# EAGLE board swt-001 (EAGLE 9.6.2)
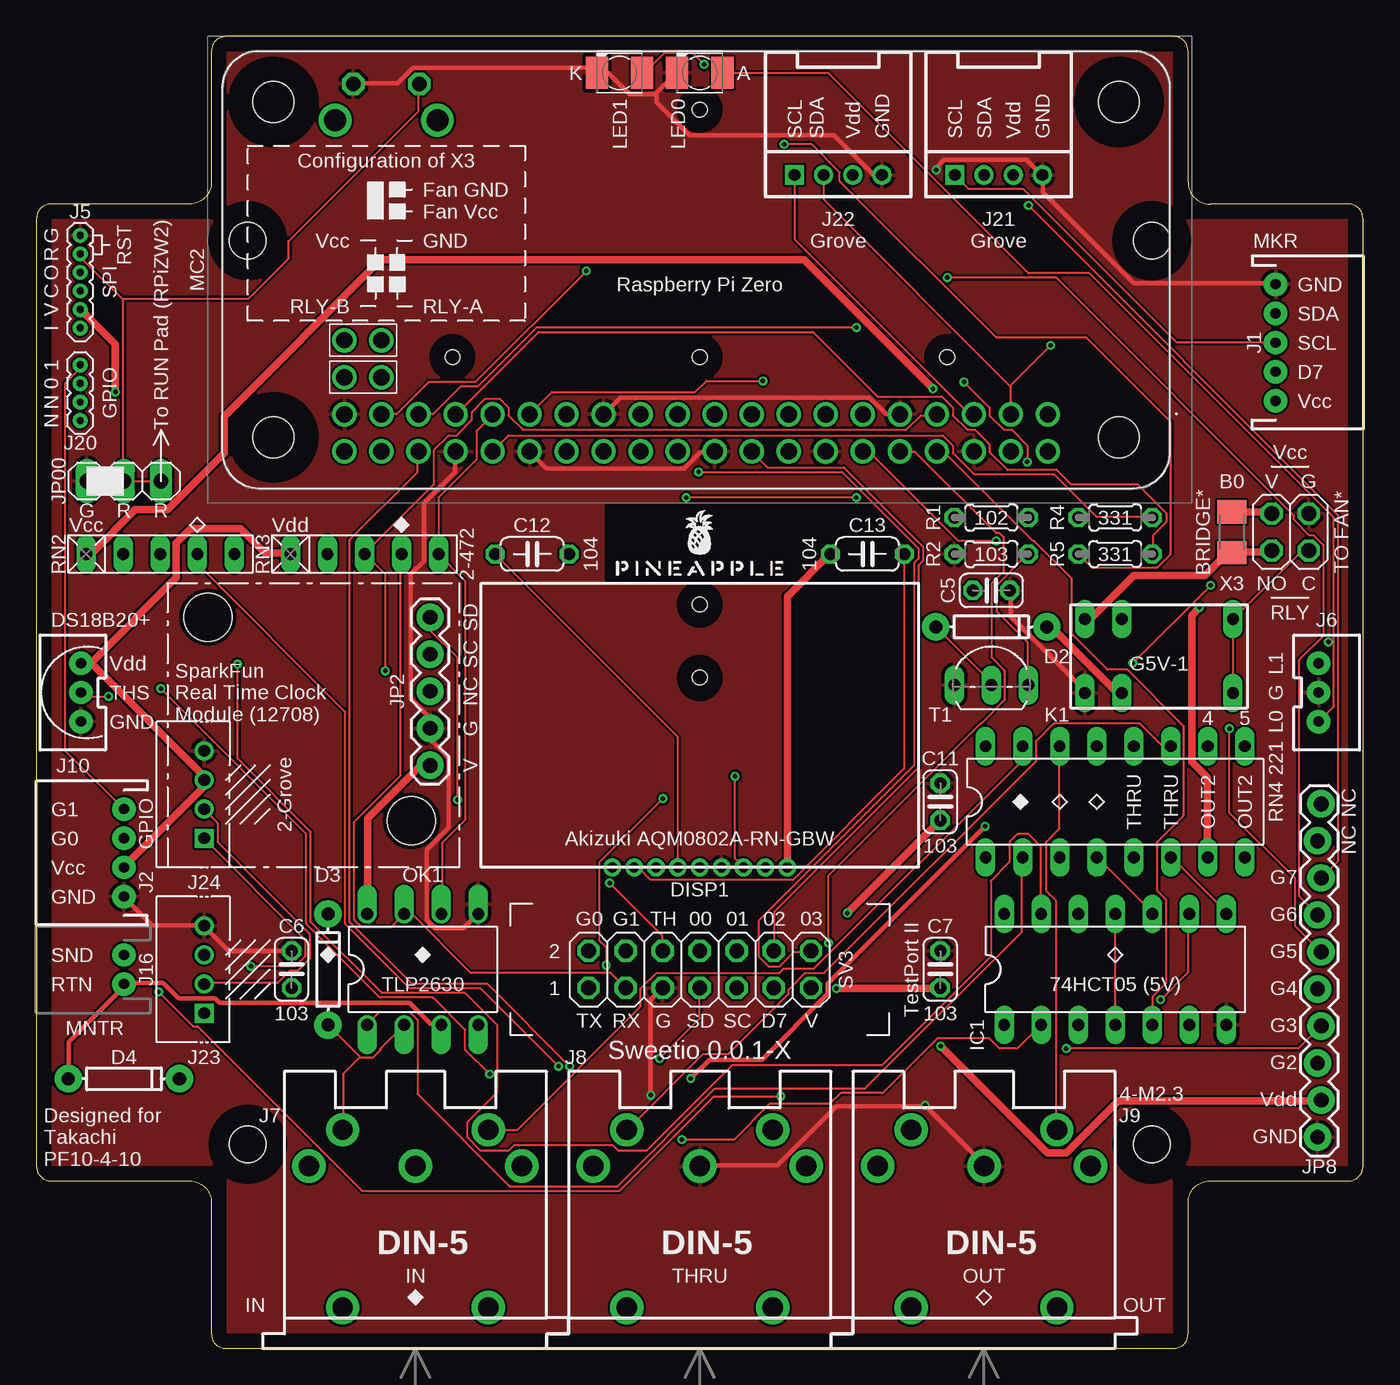
[diagram p0: board, top side]
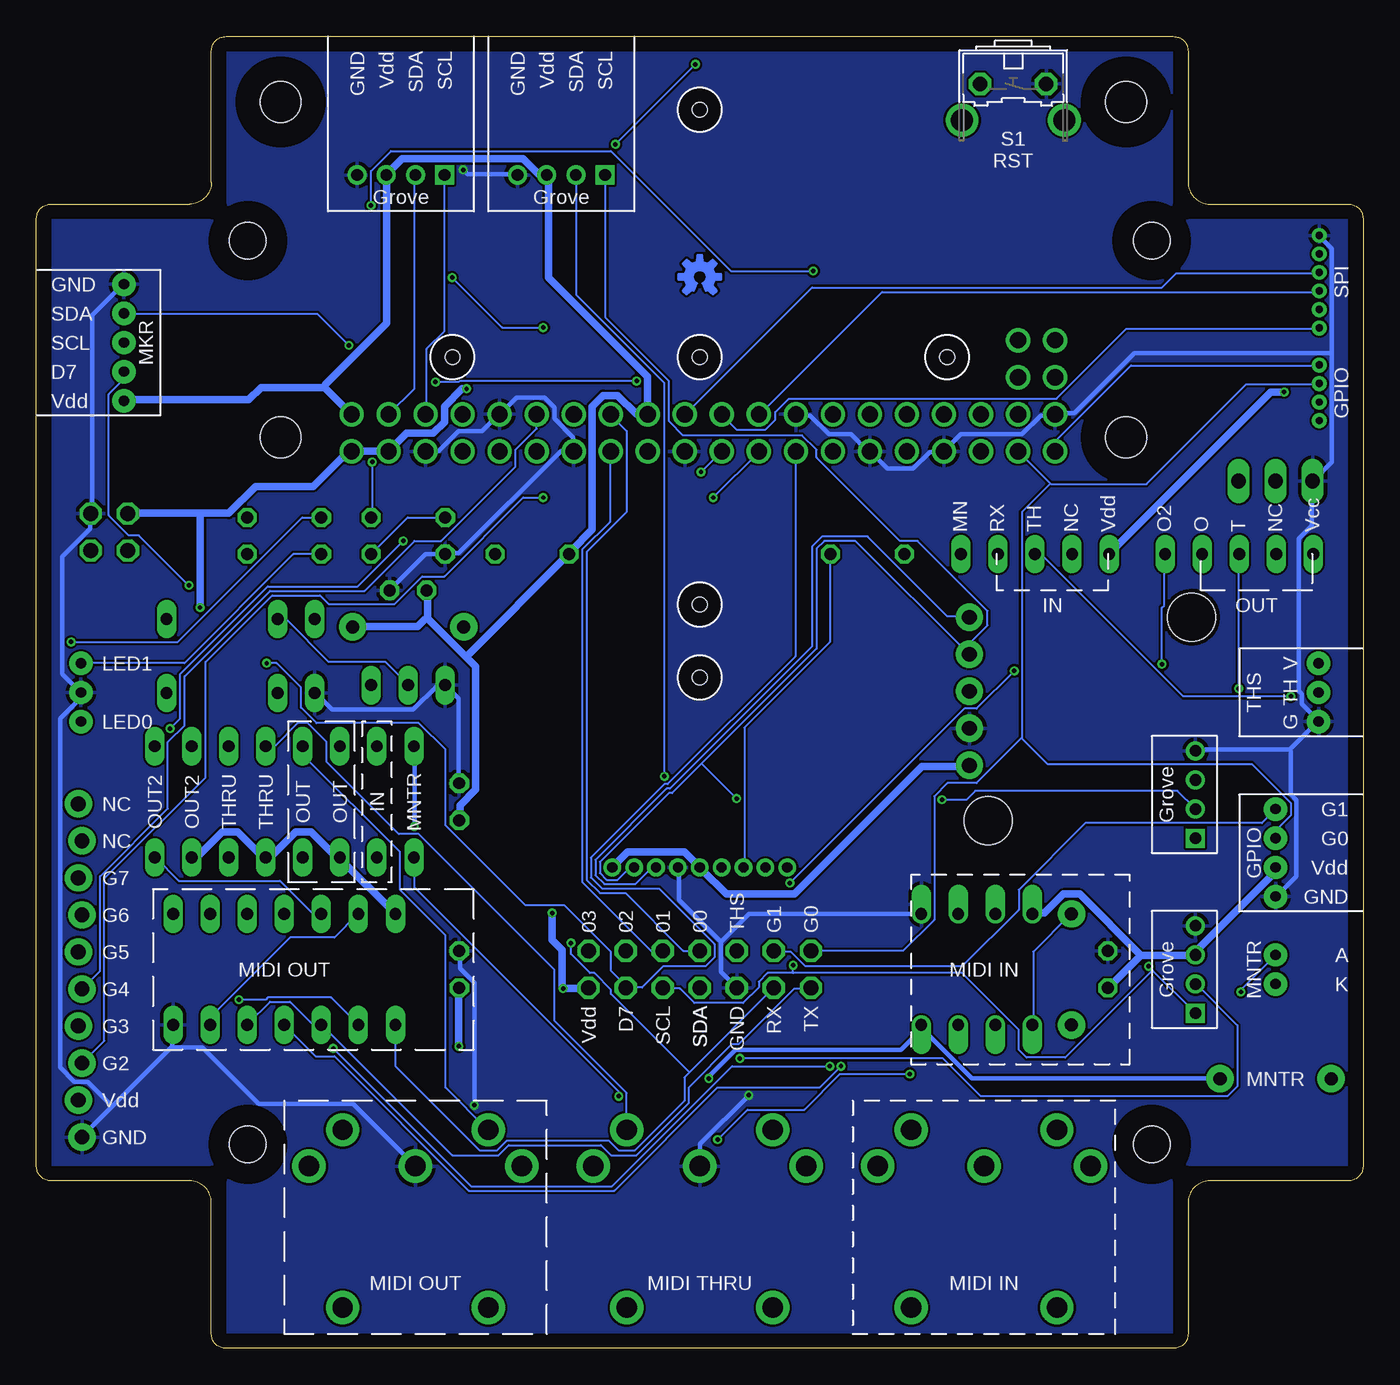
[diagram p1: board, bottom side, seen from below]

Size 91 x 90 mm. Coordinates in mm from the lower left corner, seen from the top.
Outline: 78,90 13,90 arc90 12,89 12,80 arc-90 10.5,78.5 1,78.5 arc90 0,77.5 0,12.5 arc90 1,11.5 10.5,11.5 arc-90 12,10 12,1 arc90 13,0 78,0 arc90 79,1 79,10 arc-90 80.5,11.5 90,11.5 arc90 91,12.5 91,77.5 arc90 90,78.5 80.5,78.5 arc-90 79,80 79,89 arc90 78,90
Copper layers (1*16): Top 0.035mm / dielectric 1.5mm / Bottom 0.035mm
Design rules "SeeedStudio_2layer_DRU_no_angle_20140221": minimum track width 6mil, minimum drill 12mil, track to track 6mil, track to pad 6mil, pad to pad 6mil, via to via 6mil, smd to smd 0mil, copper to edge 10mil, drill to drill 10mil, minimum pad ring 10mil, minimum via ring 6mil, stop-mask expansion 2mil, vias tented up to drill 100mil, thermal gap 10mil
Net classes: 0 default: width 0.152 mm, drill 0.152 mm, clearance 0.152 mm; 1 gnd: width 0.305 mm, drill 0.152 mm, clearance 0.152 mm; 2 power: width 0.508 mm, drill 0.152 mm, clearance 0.152 mm; 3 analog: width 0.305 mm, drill 0.152 mm, clearance 0.152 mm; 4 superpower: width 1.016 mm, drill 0.152 mm, clearance 0.152 mm
Holes 2.5 mm at 76.5,76 14.5,76 14.5,14 76.5,14
Holes 1 mm at 45.5,68 45.5,84.97 45.5,51.03 28.53,68 62.47,68 45.5,46.03
tRestrict: area 11.9,73.4 to 17.1,78.6; area 73.9,73.4 to 79.1,78.6; area 11.9,11.4 to 17.1,16.6; area 73.9,11.4 to 79.1,16.6; area 12,89 to 79,90; area 90,11.5 to 91,78.5; area 12,0 to 79,1; area 0,11.5 to 1,78.5; area 0,77.5 to 12,78.5; area 12,78.5 to 13,90; area 78,78.5 to 79,90; area 79,77.5 to 91,78.5; 19 more areas
bRestrict: area 11.9,11.4 to 17.1,16.6; area 73.9,11.4 to 79.1,16.6; area 73.9,73.4 to 79.1,78.6; area 11.9,73.4 to 17.1,78.6; area 78,0 to 79,11.5; area 79,11.5 to 91,12.5; area 90,11.5 to 91,78.5; area 79,77.5 to 91,78.5; area 78,78.5 to 79,90; area 12,89 to 79,90; area 12,78.5 to 13,90; area 0,77.5 to 12,78.5; 18 more areas

## Footprints (pad centres in the part's own frame; a part is rotated, then mirrored left to right if it is on the bottom)
M3216 = smd 1.6 x 2: 1 -1.4,0; 2 1.4,0
C025-024X044 = drill 0.813 octagon: 1 -1.27,0; 2 1.27,0
C050-024X044 = drill 0.813 octagon: 1 -2.54,0; 2 2.54,0
DIODE-1N4148 = drill 0.9 pad 1.88: A -3.81,0; C 3.81,0
AQM0802A-RN-GBW-FOOTPRINT = drill 0.7 pad 1: 1 -6,0; 2 -4.5,0; 3 -3,0; 4 -1.5,0; 5 0,0; 6 1.5,0; 7 3,0; 8 4.5,0; 9 6,0
STAND-OFF = hole 3.302: 0,0
DIL14 = drill 0.813 long: 1 -7.62,-3.81; 2 -5.08,-3.81; 3 -2.54,-3.81; 4 0,-3.81; 5 2.54,-3.81; 6 5.08,-3.81; 7 7.62,-3.81; 8 7.62,3.81; 9 5.08,3.81; 10 2.54,3.81; 11 0,3.81; 12 -2.54,3.81; 13 -5.08,3.81; 14 -7.62,3.81
JST-5-PTH = drill 0.7 pad 1.6: 1 -4,0; 2 -2,0; 3 0,0; 4 2,0; 5 4,0
JST-4-PTH = drill 0.7 pad 1.6: 1 -3,0; 2 -1,0; 3 1,0; 4 3,0
1X06_1.27MM = drill 0.508 pad 1: 1 0,0; 2 1.27,0; 3 2.54,0; 4 3.81,0; 5 5.08,0; 6 6.35,0
JST-3-PTH-VERT = drill 0.7 pad 1.6: 1 -2,-0.55; 2 0,-0.55; 3 2,-0.55
DIN5-RA-PTH = drill 1.4 pad 2.286: 1 7.3,12.5; 2 0,12.5; 3 -7.3,12.5; 4 5,15; 5 -5,15; 6 -5,2.8; 7 5,2.8
JST-2-PTH-NS = drill 0.7 pad 1.6: 1 -1,0; 2 1,0
1X04_1.27MM = drill 0.508 pad 1: 1 0,0; 2 1.27,0; 3 2.54,0; 4 3.81,0
4P-2.0-90D = drill 0.8 pad 1.27 square: 1 -3,0 | drill 0.8 pad 1.27: 2 -1,0; 3 1,0; 4 3,0
4P-2.0-W/O-BUCKLE = drill 0.8 pad 1.27 square: 1 -3,0 | drill 0.8 pad 1.27: 2 -1,0; 3 1,0; 4 3,0
1X03 = drill 1.016 long: 1 -2.54,0; 2 0,0; 3 2.54,0
1X05 = drill 1.016 pad 1.88: 1 0,0; 2 2.54,0; 3 5.08,0; 4 7.62,0; 5 10.16,0
1X10_LOCK = drill 1.016 pad 1.88: 1 0,0.127; 2 2.54,-0.127; 3 5.08,0.127; 4 7.62,-0.127; 5 10.16,0.127; 6 12.7,-0.127; 7 15.24,0.127; 8 17.78,-0.127; 9 20.32,0.127; 10 22.86,-0.127
G5V1 = drill 0.813 long: 1 -5.08,-2.54; 2 -2.54,-2.54; 5 5.08,-2.54; 6 5.08,2.54; 9 -2.54,2.54; 10 -5.08,2.54
KA-3528ASYC = smd 1.5 x 2.2: A -1.55,0; C 1.55,0
RASPBERRYPIZEROWV13 = drill 1.11: 1 -23.885,9.92; 2 -23.885,12.46; 3 -21.345,9.92; 4 -21.345,12.46; 5 -18.805,9.92; 6 -18.805,12.46; 7 -16.265,9.92; 8 -16.265,12.46; 9 -13.725,9.92; 10 -13.725,12.46; 11 -11.185,9.92; 12 -11.185,12.46; 13 -8.645,9.92; 14 -8.645,12.46; 15 -6.105,9.92; 16 -6.105,12.46; 17 -3.565,9.92; 18 -3.565,12.46; 19 -1.025,9.92; 20 -1.025,12.46; 21 1.515,9.92; 22 1.515,12.46; 23 4.055,9.92; 24 4.055,12.46; 25 6.595,9.92; 26 6.595,12.46; 27 9.135,9.92; 28 9.135,12.46; 29 11.675,9.92; 30 11.675,12.46; 31 14.215,9.92; 32 14.215,12.46; 33 16.755,9.92; 34 16.755,12.46; 35 19.295,9.92; 36 19.295,12.46; 37 21.835,9.92; 38 21.835,12.46; 39 24.375,9.92; 40 24.375,12.46; 41 24.375,7.38; 42 21.835,7.38; 43 21.835,4.84; 44 24.375,4.84 | hole 2.8: -28.755,11.5; -28.755,-11.5; 29.245,-11.5; 29.245,11.5
DIL08 = drill 0.813 offset: 1 -3.81,-3.81; 2 -1.27,-3.81; 3 1.27,-3.81; 4 3.81,-3.81; 5 3.81,3.81; 6 1.27,3.81; 7 -1.27,3.81; 8 -3.81,3.81
0204/5 = drill 0.813 octagon: 1 -2.54,0; 2 2.54,0
RN-5 = drill 0.813 long: 1 -5.08,0; 2 -2.54,0; 3 0,0; 4 2.54,0; 5 5.08,0
DIL16 = drill 0.813 long: 1 -8.89,-3.81; 2 -6.35,-3.81; 3 -3.81,-3.81; 4 -1.27,-3.81; 5 1.27,-3.81; 6 3.81,-3.81; 7 6.35,-3.81; 8 8.89,-3.81; 9 8.89,3.81; 10 6.35,3.81; 11 3.81,3.81; 12 1.27,3.81; 13 -1.27,3.81; 14 -3.81,3.81; 15 -6.35,3.81; 16 -8.89,3.81
B3F-31XX = drill 1.016 octagon: 1 -2.261,-1.245; 2 2.261,-1.245 | drill 1.499 pad 2.159: 3 -3.505,1.245; 4 3.505,1.245
2X07 = drill 1.016 octagon: 1 -7.62,-1.27; 2 -7.62,1.27; 3 -5.08,-1.27; 4 -5.08,1.27; 5 -2.54,-1.27; 6 -2.54,1.27; 7 0,-1.27; 8 0,1.27; 9 2.54,-1.27; 10 2.54,1.27; 11 5.08,-1.27; 12 5.08,1.27; 13 7.62,-1.27; 14 7.62,1.27
TO92-ECB = drill 0.813 long: B 2.54,0; C 0,0; E -2.54,0
2X02 = drill 1.016 octagon: 1 -1.27,-1.27; 2 -1.27,1.27; 3 1.27,-1.27; 4 1.27,1.27

## Placement (x,y rotation side)
B0  0  [M3216]  82,56 270 top
C5  10n  [C025-024X044]  65.5,52 0 top
C6  10n  [C025-024X044]  17.5,26 90 top
C7  100n  [C025-024X044]  62,26 90 top
C11  100n  [C025-024X044]  62,37.5 90 top
C12  1u  [C050-024X044]  34,54.5 0 top
C13  1u  [C050-024X044]  57,54.5 0 top
D2  [DIODE-1N4148]  65.5,49.5 0 top
D3  [DIODE-1N4148]  20,26 90 top
D4  [DIODE-1N4148]  6,18.5 0 top
DISP1  AQM0802A-RN-GBW  [AQM0802A-RN-GBW-FOOTPRINT]  45.5,33 0 top
H1  STAND-OFF  [STAND-OFF]  25.73,36.19 0 top
H2  STAND-OFF  [STAND-OFF]  11.76,50.16 0 top
IC1  74ACT06N  [DIL14]  74,26 0 top
J1  MKR  [JST-5-PTH]  85,69 270 top
J2  GPIO  [JST-4-PTH]  6,34 90 top
J5  SPI  [1X06_1.27MM]  3,70 90 top
J6  LED  [JST-3-PTH-VERT]  88.5,45 270 top
J7  DIN5  [DIN5-RA-PTH]  26,0 0 top
J8  DIN5  [DIN5-RA-PTH]  45.5,0 0 top
J9  DIN5  [DIN5-RA-PTH]  65,0 0 top
J10  THS  [JST-3-PTH-VERT]  2.5,45 90 top
J16  MNTR  [JST-2-PTH-NS]  6,26 90 top
J20  GPIO  [1X04_1.27MM]  3,63.65 90 top
J21  Grove  [4P-2.0-90D]  66,80.5 0 top
J22  Grove  [4P-2.0-90D]  55,80.5 0 top
J23  Grove  [4P-2.0-W/O-BUCKLE]  11.5,26 90 top
J24  Grove  [4P-2.0-W/O-BUCKLE]  11.5,38 90 top
JP00  RST  [1X03]  6,59.5 0 top
JP2  RTC  [1X05]  27,40 90 top
JP8  Extended GPIO  [1X10_LOCK]  88,14.5 90 top
K1  G5V1  [G5V1]  77,47.5 0 top
LED0  Green  [KA-3528ASYC]  45.5,87.5 180 top
LED1  Red  [KA-3528ASYC]  40,87.5 180 top
LOGO1  OSHW-LOGOS-COPPER  [OSHW-LOGO-S_COPPER]  45.5,73.5 0 bottom
MC2  RASPBERRY_PI_ZERO_W_(V1.3)  [RASPBERRYPIZEROWV13]  45.5,74 180 top
OK1  HCPL2630  [DIL08]  26.5,26 0 top
R1  1k  [0204/5]  65.5,57 0 top
R2  10k  [0204/5]  65.5,54.5 0 top
R4  1k  [0204/5]  74,57 0 top
R5  1k  [0204/5]  74,54.5 0 top
RN2  4.7k  [RN-5]  8.5,54.5 0 top
RN3  4.7k  [RN-5]  22.5,54.5 0 top
RN4  220  [DIL16]  74,37.5 0 top
S1  RST  [B3F-31XX]  24,85.5 180 bottom
SV3  Testport II  [2X07]  45.5,26 0 top
T1  2SC1815  [TO92-ECB]  65.5,45.5 0 top
U$1  PINEAPPLE450_SILK  [PINEAPPLE450_SILK]  45.5,53 0 top
X3  FAN  [2X02]  86,56 180 top

## Library data of the parts
B0 = rcl; SPICEPREFIX: R
C5-C7 R1 R2 R4 R5 = resistor
C11-C13 = rcl; SPICEPREFIX: C
D2-D4 = SparkFun-DiscreteSemi; PROD_ID: DIO-08378
DISP1 = AQM0802A-RN-GBW
H1 H2 = SparkFun-Hardware
IC1 = 74xx-eu
J1 = SparkFun-Connectors; SF_ID: PRT-09917
J2 = SparkFun-Connectors; PROD_ID: WIRE-13531; SF_ID: PRT-09916
J5 J16 J20 JP2 JP8 = SparkFun-Connectors
J6 J10 = SparkFun-Connectors; PROD_ID: CONN-13230
J7-J9 = SparkFun-Connectors; PROD_ID: CONN-09481
J21-J24 = Connector
JP00 SV3 X3 = pinhead
K1 = relay; MPN: G5V-1-DC24; OC_FARNELL: 9949593; OC_NEWARK: 36M6377
LED0 LED1 = led
LOGO1 = SparkFun-Aesthetics
MC2 = Raspberry_Pi_Zero_W_(v1.3); ARROW_PART_NUMBER: Raspberry Pi Zero W (v1.3); DESCRIPTION: Raspberry Pi Zero W (v1.3) Single-board Computers; HEIGHT: mm; MANUFACTURER_NAME: RASPBERRY-PI; MANUFACTURER_PART_NUMBER: Raspberry Pi Zero W (v1.3)
OK1 = optocoupler; MF: AGILENT TECHNOLOGIES; MPN: HCPL-2630-000E; OC_FARNELL: 9994904; OC_NEWARK: 88H7813
RN2 RN3 = resistor-net; OC_FARNELL: unknown; OC_NEWARK: unknown
RN4 = resistor-dil; OC_FARNELL: unknown; OC_NEWARK: unknown
S1 = switch-omron; MPN: B3F-3100; OC_FARNELL: 959704; OC_NEWARK: 36M3582
T1 = transistor
U$1 = pineapple

## Nets
BASE: R1.1 R2.2 T1.B
CAP1N: C12.2 DISP1.3
CAP1P: C12.1 DISP1.4
COLLECTOR: D2.A K1.9 T1.C
COMMON: K1.5 K1.6 X3.2
DIGITAL7: J1.4 MC2.26 SV3.11
DTCT0: MC2.15 SV3.8
DTCT1: MC2.16 SV3.10
DTCT2: MC2.18 SV3.12
DTCT3: MC2.22 SV3.14
FANDRIVE [power]: B0.2 K1.10 X3.4
GND [gnd]: C5.2 C6.2 C7.2 C11.2 DISP1.6 IC1.7 J1.1 J2.1 J5.6 J6.2 J8.2 J9.2 J10.1 J21.4 J22.4 J23.4 J24.4 JP00.1 JP2.2 JP8.1 K1.1 LED0.C LED1.C MC2.6 MC2.9 MC2.14 MC2.20 MC2.25 MC2.30 MC2.34 MC2.39 OK1.5 R2.1 S1.1 SV3.5 T1.E X3.1
GPIO0: J2.3 J20.3 MC2.38 SV3.2
GPIO1: J2.4 J20.4 MC2.40 SV3.4
GPIO2: JP8.3 MC2.24
GPIO3: JP8.4 MC2.36
GPIO4: JP8.5 MC2.11
GPIO5: JP8.6 MC2.12
GPIO6: JP8.7 MC2.35
GPIO7: JP8.8 MC2.37
LCDVOUT: C13.2 DISP1.2
LED0: MC2.32 R4.2
LED0A: J6.3 LED0.A R4.1
LED1: MC2.33 R5.2
LED1A: J6.1 LED1.A R5.1
MIDIINSND: D3.C OK1.1 RN4.2
MIRTN: D3.A J7.5 OK1.2
MISND: J7.4 RN4.15
MISO: J5.1 MC2.21
MNTR: MC2.31 OK1.6 RN3.5
MNTRA: J16.2 RN4.1
MNTRAA [gnd]: D4.C OK1.4 RN4.16
MNTRK [gnd]: D4.A J16.1 OK1.3
MO2RTN: RN4.9
MO2RTNRAW: IC1.12 RN4.8
MO2SND: RN4.10
MORTN: J9.5 RN4.13
MORTNRAW: IC1.10 RN4.4
MOSI: J5.4 MC2.19
MOSND: J9.4 RN4.14
MTRTN: J8.5 RN4.11
MTRTNRAW: IC1.8 RN4.6
MTSND: J8.4 RN4.12
NMO2RTN: IC1.6 IC1.13 RN2.5
NMORTN: IC1.4 IC1.11 RN2.4
NMTRTN: IC1.2 IC1.9 RN2.3
RLY: MC2.29 R1.2
RST: J5.5 JP00.2 JP00.3 S1.2
RX: IC1.1 MC2.10 OK1.7 RN3.4 SV3.3
SCK: J5.3 MC2.23
SCL: DISP1.8 J1.3 J21.1 J22.1 J23.1 J24.1 JP2.4 MC2.5 SV3.9
SDA: DISP1.7 J1.2 J21.2 J22.2 J23.2 J24.2 JP2.5 MC2.3 SV3.7
THS: J10.2 MC2.7 RN3.3 SV3.6
TX: IC1.3 IC1.5 MC2.8 SV3.1
VCC [power]: B0.1 IC1.14 MC2.2 MC2.4 RN2.1 RN4.3 RN4.5 RN4.7 X3.3
VDD [power]: C5.1 C6.1 C7.1 C11.1 C13.1 D2.C DISP1.5 DISP1.9 J1.5 J2.2 J5.2 J10.3 J21.3 J22.3 J23.3 J24.3 JP2.1 JP8.2 K1.2 MC2.1 MC2.17 OK1.8 RN3.1 SV3.13

## Tracks (layer width: path | path; a pad name or v marks a point on that pad's centre or on a via)
BASE
  Top 0.152: T1.B 67.97,45.57 67.97,48.46 65.84,50.6 65.84,52.35 67.97,54.48 R2.2
  Bottom 0.152: R1.1 63.02,57 65.53,57 67.97,54.56 R2.2
CAP1N
  Bottom 0.152: DISP1.3 42.44,33.07 42.44,42.6 36.58,48.46 36.58,54.48 C12.2
CAP1P
  Top 0.152: DISP1.4 43.97,33.07 43.97,41.99 31.47,54.48 C12.1
COLLECTOR
  Top 0.152: T1.C 65.46,45.57 65.46,45.72 61.72,49.45 D2.A
  Bottom 0.152: K1.9 74.45,49.99 73.84,49.99 70.94,47.09 67.06,47.09 65.53,45.57 T1.C
COMMON
  Top 0.152: K1.5 82.07,45.03 82.07,49.99 K1.6 82.14,50.06 86.79,54.71 87.25,54.71 X3.2
DIGITAL7  (via drill 0.3)
  Top 0.152: v75.21,47.02 v80.54,52.35
  Bottom 0.152: MC2.26 38.94,61.49 38.94,47.47 47.7,38.71 47.93,38.71 52.96,33.68 52.96,32.31 52.2,31.55 48.31,31.55 44.5,27.74 44.5,26.82 45.11,26.21 48.01,26.21 49.45,24.77 50.52,24.77 SV3.11 50.52,24.84 51.59,25.91 51.59,27.2 54.79,30.4 57.45,30.4 62.94,35.89 62.94,41.07 64.77,42.9 71.78,42.9 72.85,43.97 72.85,45.34 74.52,47.02 v75.21,47.02 | v80.54,52.35 83.97,55.78 84.66,55.78 86.03,57.15 86.03,65.46 85.04,66.45 85.04,66.98 J1.4
DTCT0
  Bottom 0.152: SV3.8 45.57,27.28 46.63,27.28 50.6,31.24 52.35,31.24 53.26,32.16 53.26,54.63 50.52,57.38 50.52,62.94 51.59,64.01 MC2.15
DTCT1
  Bottom 0.152: SV3.10 48.08,27.28 48.84,27.28 53.57,32 53.57,54.79 51.66,56.69 51.66,61.49 MC2.16
DTCT2
  Top 0.152: SV3.12 50.6,27.28 50.6,29.95 60.5,39.85 60.5,53.72 60.81,54.03 60.81,55.02 55.4,60.43 50.14,60.43 49.07,61.49 MC2.18
DTCT3  (via drill 0.3)
  Top 0.152: v45.41,60.12 55.24,60.12 60.5,54.86 60.5,54.18 60.2,53.87 60.2,40.01 49.53,29.34 49.53,26.9 50.22,26.21 50.98,26.21 51.97,27.2 53.11,27.2 SV3.14
  Bottom 0.152: v45.41,60.12 44.04,61.49 MC2.22
FANDRIVE
  Top 0.508: X3.4 84.66,54.71 84.58,54.63 82.07,54.63 B0.2 81.76,54.63 80.16,53.03 75.29,53.03 72.31,50.06 71.93,50.06 K1.10
GND  (via drill 0.3)
  Top 0.305: 42.44,86.03 40.69,86.03 39.24,87.48 38.48,87.48 LED1.C 38.33,87.55 38.02,87.86 25.83,87.86 24.77,86.79 21.79,86.79 S1.1 | 42.44,86.03 43.89,87.48 LED0.C | J22.4 57.99,80.54 57.38,80.54 54.71,83.21 44.81,83.21 42.52,85.5 42.52,85.95 42.44,86.03 | J1.1 84.96,73.08 75.29,73.08 69.04,79.32 69.04,80.47 J21.4 68.89,80.54 67.89,81.53 62.26,81.53 61.72,81 v61.72,80.85 | J9.2 65.08,12.57 v60.96,16.69 60.88,16.61 54.86,16.61 50.83,12.57 45.57,12.57 J8.2 | K1.1 71.86,45.03 71.86,45.19 66.83,50.22 66.83,51.97 C5.2 | OK1.5 30.25,29.79 29.26,28.8 27.36,28.8 26.75,29.41 26.75,34.21 28.27,35.74 28.27,40.54 27.05,41.76 27.05,42.52 JP2.2 26.98,42.67 26.98,43.28 25.68,44.58 25.68,53.11 26.59,54.03 26.59,57.99 28.73,60.12 28.73,61.49 MC2.34 | MC2.20 46.48,61.49 45.57,61.49 44.42,60.35 34.98,60.35 33.83,61.49 MC2.30 | J2.1 6.02,30.94 7.92,29.03 11.43,29.03 J23.4 11.58,28.88 13.18,27.28 17.45,27.28 C6.2 | MC2.9 59.21,64.08 58.29,64.08 57.15,65.23 40.08,65.23 38.94,64.08 MC2.25 | v42.14,17.37 42.14,23.93 42.9,24.69 SV3.5
  Bottom 0.305: J1.1 85.04,73 87.17,70.87 87.17,57.38 X3.1 87.33,57.23 87.33,56.24 89.23,54.33 89.23,46.25 88.01,45.03 J6.2 88.01,44.88 88.01,44.58 89.38,43.2 89.38,19.28 88.39,18.29 87.48,18.29 85.8,16.61 | v61.72,80.85 61.42,80.54 58.06,80.54 J22.4 | 81.69,20.73 81.69,22.17 IC1.7 | 85.8,16.61 87.86,14.55 JP8.1 | 85.8,16.61 81.69,20.73 | v60.96,16.69 60.96,25.07 61.95,26.06 61.95,27.2 C7.2 | 81.69,20.73 81.61,20.65 79.63,20.65 75.74,16.76 69.27,16.76 65.08,12.57 J9.2 | MC2.6 64.24,61.57 63.4,61.57 62.03,62.94 60.43,62.94 59.36,64.01 MC2.9 59.21,64.08 58.06,65.23 56.16,65.23 55.47,64.54 55.47,63.78 54.18,62.48 54.18,61.57 MC2.14 54.33,61.57 55.02,61.57 62.03,54.56 62.87,54.56 R2.1 63.02,54.48 64.31,54.48 66.75,52.05 C5.2 | C11.2 62.03,38.79 62.03,44.58 62.94,45.49 T1.E 63.09,45.49 63.48,45.49 65.15,43.81 70.71,43.81 71.86,44.96 K1.1 | 44.04,27.89 46.94,30.79 46.94,32.99 DISP1.6 | 44.04,27.89 44.04,25.83 42.98,24.77 SV3.5 | 44.04,27.89 42.14,29.79 30.33,29.79 OK1.5 | MC2.25 38.86,64.01 37.95,64.01 36.65,62.71 35.13,62.71 33.98,61.57 MC2.30 33.76,61.49 32.61,60.35 30.86,60.35 29.72,61.49 28.8,61.49 MC2.34 28.65,61.65 27.58,62.71 23.39,62.71 22.1,64.01 21.18,64.01 MC2.39 21.03,64.16 19.81,64.16 15.7,68.28 2.13,68.28 | 2.13,68.28 2.13,60.81 3.43,59.51 JP00.1 3.5,59.36 3.5,56.46 4.42,55.55 4.42,45.11 4.19,44.88 4.19,44.2 3.12,43.13 J10.1 3.12,42.98 5.03,41.07 | 2.13,68.28 2.13,75.44 2.97,76.28 J5.6 | 5.03,41.07 11.43,41.07 J24.4 | 5.03,41.07 4.95,41 4.95,38.02 4.57,37.64 4.57,32.38 5.94,31.01 J2.1 | v42.14,17.37 45.49,14.02 45.49,12.57 J8.2
  pour Top: -1,-1 92,-1 92,91 -1,91
  pour Bottom: -2,-2 93,-2 93,92 -2,92
GPIO0
  Bottom 0.152: 21.45,59.32 23.62,61.49 MC2.38 | 21.45,59.32 21.41,59.28 14.86,59.28 8,66.14 3.05,66.14 J20.3 | 23.43,41.87 23.39,41.91 23.39,57.38 21.45,59.32 | 23.43,41.87 26.52,38.79 28.5,38.79 29.41,37.87 29.41,29.41 31.55,27.28 SV3.2 | 23.43,41.87 21.64,40.08 7.62,40.08 4.95,37.41 4.95,36.58 5.94,35.59 5.94,35.05 J2.3
GPIO1
  Top 0.152: J20.4 2.97,67.44 2.97,67.21 1.98,66.22 1.98,41 5.94,37.03 J2.4
  Bottom 0.152: J20.4 3.05,67.44 15.93,67.44 21.11,62.26 21.11,61.57 MC2.40 | SV3.4 40.39,27.2 39.24,27.2 38.25,26.21 27.51,26.21 23.62,30.1 23.62,31.47 19.05,36.04 6.93,36.04 6.02,36.96 J2.4
GPIO2  (via drill 0.3)
  Top 0.152: v56.24,58.37 v44.58,58.37
  Bottom 0.152: v44.58,58.37 41.45,61.49 MC2.24 | v56.24,58.37 57.61,58.37 63.02,52.96 64.54,52.96 66.45,51.05 70.94,51.05 71.55,51.66 74.83,51.66 79.4,47.09 79.4,39.17 86.33,32.23 86.33,21.11 87.86,19.58 JP8.3
GPIO3  (via drill 0.3)
  Top 0.152: v36.58,19.36 30.94,24.99 25.76,24.99 21.49,29.26 21.49,55.47 26.14,60.12 26.14,61.49 MC2.36 | v70.64,20.57 86.56,20.57 88.09,22.1 JP8.4
  Bottom 0.152: v36.58,19.36 43.28,19.36 51.51,11.12 61.19,11.12 v70.64,20.57
GPIO4
  Bottom 0.152: MC2.11 56.69,64.01 56.69,63.09 58.14,61.65 58.14,60.5 63.25,55.4 65.08,55.4 68.5,51.97 74.98,51.97 80.85,46.1 80.85,42.75 81.99,41.6 81.99,37.03 86.64,32.38 86.64,25.91 87.86,24.69 JP8.5
GPIO5  (via drill 0.3)
  Top 0.152: v65.84,55.4 63.25,55.4 57.15,61.49 56.69,61.49 MC2.12 | v81.84,42.52 81.84,36.73 86.33,32.23 86.33,28.96 88.09,27.2 JP8.6
  Bottom 0.152: v65.84,55.4 68.96,52.27 75.13,52.27 81.15,46.25 81.15,43.2 v81.84,42.52
GPIO6  (via drill 0.3)
  Top 0.152: v56.24,70.03 34.29,70.03 30.25,65.99 29.11,65.99 27.2,64.08 26.21,64.08 MC2.35 | v62.48,73.46 69.95,73.46 86.26,57.15 86.26,56.84 87.33,55.78 87.63,55.78 88.32,55.09 88.32,48.92 86.64,47.24 86.64,31.01 87.86,29.79 JP8.7
  Bottom 0.152: v56.24,70.03 59.05,70.03 v62.48,73.46
GPIO7  (via drill 0.3)
  Top 0.152: v37.72,73.91 30.1,66.29 26.9,66.29 24.69,64.08 23.7,64.08 MC2.37 | v68.05,78.41 89.31,57.15 89.31,33.45 88.16,32.31 JP8.8
  Bottom 0.152: v37.72,73.91 43.36,73.91 51.59,82.14 66.67,82.14 68.05,80.77 v68.05,78.41
LCDVOUT
  Top 0.152: DISP1.2 41.07,32.99 41.3,32.99 42.14,32.16 51.89,32.16 59.51,39.78 59.51,54.48 C13.2
LED0
  Top 0.152: R4.2 76.5,57.07 72.69,57.07 69.8,59.97 64.31,59.97 62.87,61.42 62.87,61.95 62.18,62.64 32.38,62.64 31.32,61.57 MC2.32
LED0A  (via drill 0.3)
  Top 0.152: 89,48.46 89,44.04 88.01,43.05 J6.3 | 89,48.46 89,57 72.24,73.76 68.05,73.76 54.33,87.48 47.09,87.48 LED0.A | 89,48.46 v88.62,48.46
  Bottom 0.152: v88.62,48.46 81.31,48.46 72.77,57 71.48,57 R4.1
LED1
  Top 0.152: R5.2 76.58,54.56 76.58,55.78 77.5,56.69 77.5,57.3 75.51,59.28 70.94,59.28 69.95,60.27 66.6,60.27 65.38,61.49 65.38,62.03 64.39,63.02 63.86,63.02 62.87,64.01 62.87,64.54 62.1,65.3 57.68,65.3 53.26,69.72 34.44,69.72 28.8,64.08 MC2.33
LED1A  (via drill 0.3)
  Top 0.152: v45.8,88.09 45.03,88.85 43.05,88.85 41.76,87.55 41.6,87.55 LED1.A | v51.28,82.6 53.19,82.6 55.09,80.7 55.09,80.09 65.84,69.34 72.01,69.34 77.8,63.55 77.8,54.48 76.89,53.57 72.39,53.57 71.48,54.48 R5.1
  Bottom 0.152: v51.28,82.6 v45.8,88.09 | J6.1 87.94,47.02 80.85,47.02 73.38,54.48 71.48,54.48 R5.1
MIDIINSND
  Top 0.152: RN4.2 67.59,33.68 67.59,28.57 56.84,17.83 46.56,17.83 39.85,11.12 32.46,11.12 26.14,17.45 26.14,22.55 25.6,23.09 23.55,23.09 22.71,22.25 OK1.1
  Bottom 0.152: OK1.1 22.63,22.25 22.63,27.2 20.04,29.79 D3.C
MIRTN
  Top 0.152: 22.21,20 20.04,22.17 D3.A | 22.21,20 22.25,19.96 23.09,19.96 23.62,20.5 23.62,20.57 25.22,22.17 OK1.2 | 22.21,20 21.03,18.82 21.03,15.01 J7.5
MISND
  Top 0.152: RN4.15 67.59,41.3 67.59,40.31 53.34,26.06 51.28,26.06 50.98,25.76 42.52,25.76 41.45,24.69 41.45,23.47 32.99,15.01 31.01,15.01 J7.4
MISO
  Bottom 0.152: J5.1 3.05,69.95 16.23,69.95 21.03,65.15 39.4,65.15 40.31,64.24 40.31,63.7 41,63.02 42.98,63.02 43.97,64.01 MC2.21
MNTR
  Top 0.152: MC2.31 31.24,64.01 30.18,62.94 30.18,60.96 27.58,58.37 27.58,54.56 RN3.5 27.58,54.48 29.41,52.65 29.41,36.27 27.81,34.67 27.81,29.87 OK1.6
MNTRA  (via drill 0.3)
  Top 0.152: v51.05,17.3 46.48,17.3 40.01,10.82 22.33,10.82 11.05,22.1 10.74,22.1 v8.38,24.46
  Bottom 0.152: v51.05,17.3 51.05,17.6 65.08,31.62 65.08,33.68 RN4.1 | v8.38,24.46 8.38,24.61 6.02,26.98 J16.2
MNTRAA  (via drill 0.3)
  Top 0.305: v65.08,35.81 54.25,24.99 54.25,24.31 49.76,19.81 46.18,19.81 v44.88,18.52
  Bottom 0.305: D4.C 9.83,18.52 26.82,18.52 30.25,21.95 30.25,22.17 OK1.4 30.33,21.87 31.7,20.5 43.05,20.5 44.88,18.67 v44.88,18.52 | v65.08,35.81 65.08,41.3 RN4.16
MNTRK
  Top 0.305: OK1.3 27.74,22.25 27.05,22.25 25.6,23.7 12.57,23.7 12.27,24 9.75,24 8.69,25.07 6.02,25.07 J16.1 6.02,24.84 2.21,21.03 2.21,18.52 D4.A
MO2RTNRAW
  Bottom 0.152: IC1.12 71.48,29.87 72.08,29.87 74.3,32.08 81.23,32.08 82.83,33.68 RN4.8
MORTN
  Bottom 0.152: RN4.13 72.69,41.3 72.69,40.69 66.06,34.06 66.06,31.47 62.94,28.35 62.94,17.91 60.05,15.01 J9.5
MORTNRAW
  Top 0.152: RN4.4 72.77,33.68 76.58,29.87 IC1.10
MOSI
  Bottom 0.152: J5.4 3.05,73.76 12.8,73.76 13.79,72.77 37.8,72.77 46.48,64.08 MC2.19
MOSND
  Top 0.152: RN4.14 70.18,35.66 69.27,34.75 69.27,31.39 69.95,30.71 69.95,15.01 J9.4
MTRTN
  Top 0.152: RN4.11 77.8,41.38 77.19,41.38 75.67,42.9 69.8,42.9 68.58,41.68 68.58,40.31 54.03,25.76 52.73,25.76 51.59,24.61 51.59,24.31 47.47,20.19 45.72,20.19 40.54,15.01 J8.5
MTRTNRAW
  Top 0.152: RN4.6 77.88,33.68 81.69,29.87 IC1.8
MTSND
  Bottom 0.152: RN4.12 75.21,41.38 74.6,41.38 73.08,42.9 72.39,42.9 71.09,41.6 71.09,40.23 66.14,35.28 64.77,35.28 55.47,25.98 55.47,22.48 50.52,17.53 50.52,15.01 J8.4
NMO2RTN  (via drill 0.3)
  Top 0.152: v13.79,46.94 13.79,40.46 18.82,35.43 18.82,29.26 23.7,24.38 29.41,24.38 31.62,22.17 31.62,17.6 29.57,15.54 29.57,14.48 30.48,13.56 32.38,13.56 32.77,13.95 39.55,13.95 39.93,13.56 41.83,13.56 47.7,19.43 57.99,19.43 65.46,26.9 65.46,32.08 66.75,33.38 66.75,34.75 67.28,35.28 68.05,35.28 68.89,34.44 68.89,29.87 IC1.13
  Bottom 0.152: v13.79,46.94 13.79,50.83 13.64,50.98 13.64,54.48 RN2.5 | IC1.6 79.02,22.25 79.02,22.78 73.61,28.19 70.56,28.19 68.96,29.79 IC1.13
NMORTN  (via drill 0.3)
  Top 0.152: IC1.4 73.99,22.25 73.99,29.79 IC1.11 | v35.81,19.36 30.48,24.69 25.6,24.69 21.18,29.11 21.18,43.66 11.05,53.8 11.05,54.48 RN2.4
  Bottom 0.152: v35.81,19.36 37.26,17.91 44.27,17.91 51.36,10.82 61.34,10.82 70.56,20.04 71.86,20.04 73.99,22.17 IC1.4
NMTRTN  (via drill 0.3)
  Top 0.152: v8.53,45.26 18.52,35.28 18.52,29.11 23.55,24.08 27.2,24.08 29.41,21.87 29.41,20.5 v31.09,18.82 | v44.27,14.33 47.85,14.33 50.29,16.76 54.41,16.76 55.17,17.53 58.06,17.53 61.8,21.26 65.38,21.26 66.06,20.57 67.28,20.57 68.89,22.17 IC1.2 | v77.11,23.93 79.02,25.83 79.02,29.79 IC1.9
  Bottom 0.152: v8.53,45.26 8.53,54.48 RN2.3 | v31.09,18.82 35.89,18.82 38.33,16.38 42.22,16.38 v44.27,14.33 | v77.11,23.93 75.29,23.93 75.13,24.08 70.79,24.08 68.96,22.25 IC1.2
RLY  (via drill 0.3)
  Top 0.152: v67.97,60.81 67.97,61.95 66.9,63.02 66.37,63.02 65.38,64.01 65.38,64.54 v63.63,66.29 | v49.84,66.37 45.95,66.37 45.19,65.61 35.36,65.61 MC2.29
  Bottom 0.152: v67.97,60.81 67.97,57.07 R1.2 | v63.63,66.29 62.03,66.29 61.95,66.37 v49.84,66.37
RST
  Top 0.152: 5.91,71.97 5.94,71.93 5.94,59.51 JP00.2 6.02,59.51 8.53,59.51 JP00.3 | 5.91,71.97 3.05,74.83 3.05,75.06 J5.5 | S1.2 26.21,86.72 26.21,84.89 17.3,75.97 17.3,74.75 14.55,72.01 5.94,72.01 5.91,71.97
RX  (via drill 0.3)
  Top 0.152: SV3.3 40.39,24.77 39.4,25.76 29.79,25.76 25.76,29.79 25.3,29.79 OK1.7 25.22,29.79 24.31,28.88 22.33,28.88 21.79,29.41 21.79,36.12 24.99,39.32 24.99,54.48 RN3.4 | v54.33,27.81 54.33,32.46 64.77,42.9 64.85,42.9 66.45,44.5 66.45,46.48 65.53,47.4 65.53,52.5 66.37,53.34 66.37,55.63 66.06,55.93 65.84,55.93 60.27,61.49 59.28,61.49 MC2.10
  Bottom 0.152: 46.22,18.94 40.46,24.69 SV3.3 | 46.22,18.94 46.56,18.59 46.56,16.99 49.99,13.56 51.05,13.56 51.74,14.25 58.75,14.25 59.44,13.56 60.58,13.56 66.37,19.36 66.37,22.17 IC1.1 | v54.33,27.81 54.33,27.05 53.03,25.76 52.73,25.76 51.59,24.61 51.59,24.31 46.22,18.94
SCK
  Bottom 0.152: J5.3 3.05,72.47 32.99,72.47 41.38,64.08 MC2.23
SCL  (via drill 0.3)
  Top 0.152: J22.1 52.05,80.47 52.05,76.05 64.01,64.08 64.24,64.08 MC2.5 | J1.3 84.96,69.04 78.18,69.04 67.67,79.55 63.93,79.55 63.02,80.47 J21.1 | v14.71,26.21 17.75,26.21 18.44,26.9 18.44,28.04 11.51,34.98 J24.1 | v42.98,37.72 38.63,33.38 38.63,27.96 39.09,27.51 v39.09,26.29
  Bottom 0.152: J21.1 63.02,80.47 63.02,69.8 64.24,68.58 64.24,64.08 MC2.5 | 45.38,40.12 37.49,48.01 37.49,54.86 36.96,55.4 34.82,55.4 27.05,47.62 JP2.4 27.36,48.01 25.76,49.61 25.76,50.6 30.56,55.4 31.77,55.4 37.49,61.11 37.49,61.65 38.48,62.64 46.63,62.64 47.62,63.63 47.62,66.37 51.97,70.71 51.97,80.47 J22.1 | 45.38,40.12 47.4,38.1 47.62,38.1 52.35,33.38 52.35,32.61 51.89,32.16 51.13,32.16 50.29,32.99 50.06,32.99 DISP1.8 | v14.71,26.21 14.44,25.95 | 14.44,25.95 11.51,23.01 J23.1 | 39.09,25.76 27.51,25.76 23.62,21.87 23.62,20.5 23.09,19.96 20.42,19.96 14.44,25.95 | 39.09,25.76 40.84,25.76 41.45,25.15 41.45,24.77 42.52,23.7 45.87,23.7 46.86,24.69 48.01,24.69 SV3.9 | v42.98,37.72 45.38,40.12 | 39.09,25.76 v39.09,26.29
SDA  (via drill 0.3)
  Top 0.152: 66.79,66.03 66.83,65.99 66.83,64.08 MC2.3 | 66.79,66.03 54.03,78.79 54.03,80.47 J22.2 | 66.79,66.03 v69.57,68.81 | J23.2 11.51,25.07 16.54,25.07 17.37,25.91 17.91,25.91 18.75,26.75 18.75,28.42 12.42,34.75 12.42,36.04 11.51,36.96 J24.2 | v42.75,19.89 45.49,22.63 45.49,24.69 SV3.7 | v28.88,37.64 28.88,47.4 27.05,49.23 27.05,50.14 JP2.5 | v47.93,39.24 47.93,33.6 48.46,33.07 DISP1.7
  Bottom 0.152: J21.2 65.08,80.47 65.08,65.84 66.83,64.08 MC2.3 | v69.57,68.81 71.7,70.94 84.96,70.94 J1.2 | DISP1.7 48.54,32.99 48.77,32.99 49.91,31.85 52.05,31.85 52.65,32.46 52.65,33.53 47.78,38.41 47.55,38.41 37.8,48.16 37.8,55.02 37.11,55.7 33.98,55.7 28.5,50.22 27.05,50.22 JP2.5 | v42.75,19.89 28.8,19.89 26.21,17.3 9.3,17.3 8.61,17.98 8.61,22.17 11.43,24.99 J23.2 | v28.88,37.64 27.2,37.64 26.59,38.25 12.72,38.25 11.51,37.03 J24.2 | v47.93,39.24 47.93,66.22 53.95,72.24 53.95,80.47 J22.2
THS  (via drill 0.3)
  Top 0.152: v4.95,44.73 3.35,44.73 3.12,44.96 J10.2 | v39.32,31.93 42.9,28.35 42.9,27.28 SV3.6 | v23.93,46.48 23.93,53.11 22.55,54.48 RN3.3 22.55,54.56 27.28,59.28 27.28,61.65 28.27,62.64 28.8,62.64 29.87,63.7 29.87,64.24 30.79,65.15 31.77,65.15 32.38,64.54 32.38,64.01 33.38,63.02 59.66,63.02 60.66,64.01 61.72,64.01 MC2.7
  Bottom 0.152: v4.95,44.73 12.34,44.73 22.1,54.48 22.48,54.48 RN3.3 | v39.32,31.93 27.36,43.89 26.52,43.89 v23.93,46.48
TX
  Top 0.152: MC2.8 61.8,61.49 62.26,61.49 68.35,55.4 68.43,55.4 71.02,52.81 71.02,49 73.46,46.56 74.83,46.56 78.72,42.67 78.72,36.58 76.89,34.75 76.89,31.39 77.5,30.79 77.5,25.07 76.58,24.16 76.58,22.25 IC1.5
  Bottom 0.152: IC1.5 76.5,22.25 74.98,23.77 73.61,23.77 72.08,22.25 71.48,22.25 IC1.3 71.4,22.17 62.48,13.26 59.28,13.26 58.6,13.95 52.27,13.95 51.59,13.26 49.84,13.26 46.25,16.84 46.25,17.91 43.28,20.88 42.82,20.88 39.01,24.69 37.95,24.69 SV3.1
VCC  (via drill 0.3)
  Top 0.508: B0.1 82.07,57.38 84.58,57.38 84.66,57.3 X3.3 | v61.49,65.84 52.65,74.68 23.62,74.68 12.88,63.93 12.88,61.42 8.99,57.53 6.78,57.53 3.81,54.56 3.43,54.56 RN2.1 | v79.78,50.83 79.25,50.29 79.25,40.23 80.31,39.17 80.31,33.76 RN4.7
  Bottom 0.508: IC1.14 66.45,29.87 70.26,33.68 RN4.3 70.48,33.76 72.16,35.43 73.23,35.43 74.91,33.76 75.21,33.76 RN4.5 75.51,33.76 77.19,35.43 78.26,35.43 79.93,33.76 80.31,33.76 RN4.7 | v61.49,65.84 61.8,65.84 63.02,64.62 63.02,63.55 63.78,62.79 65.61,62.79 66.83,61.57 MC2.4 67.06,61.57 69.34,61.57 MC2.2 69.65,61.49 72.01,59.13 75.97,59.13 77.8,57.3 79.78,57.3 | 79.78,57.3 84.66,57.3 X3.3 | 79.78,57.3 v79.78,50.83
VDD  (via drill 0.3)
  Top 0.508: v5.41,65.61 5.41,68.89 3.05,71.25 J5.2 | J2.2 6.02,33.07 11.43,38.48 11.43,38.94 J24.3 11.51,39.24 3.81,46.94 | 3.81,46.94 3.12,46.94 J10.3 | JP2.1 26.98,39.93 26.29,39.93 22.71,36.35 22.71,29.87 OK1.8 | RN3.1 17.37,54.56 15.7,54.56 14.02,56.24 10.59,56.24 9.6,55.24 9.6,52.88 3.89,47.17 3.81,46.94 | v54.86,24.69 61.95,24.69 C7.1 | v62.03,20.73 69.34,13.41 70.64,13.41 74.22,16.99 88.09,16.99 JP8.2 | K1.2 74.45,45.03 74.07,45.03 69.65,49.45 69.34,49.45 D2.C | DISP1.9 51.51,33.07 51.51,51.59 54.41,54.48 C13.1 | v55.63,29.87 61.95,36.2 C11.1
  Bottom 0.508: v5.41,65.61 6.33,65.61 17.37,54.56 RN3.1 | 15.24,26.98 11.51,26.98 J23.3 11.51,27.2 6.02,32.69 6.02,32.99 J2.2 | 15.24,26.98 17.45,24.77 C6.1 | 15.24,26.98 19.43,31.17 20.57,31.17 21.87,29.87 22.63,29.87 OK1.8 | 71.25,65.91 75.59,65.91 76.43,65.08 84.96,65.08 J1.5 | 71.25,65.91 69.42,64.08 MC2.1 | 71.25,65.91 71.17,66.14 66.98,70.33 66.98,80.24 J21.3 66.98,80.54 65.91,81.61 57.61,81.61 56.54,80.54 56.01,80.54 J22.3 55.85,80.31 55.85,73.46 49.07,66.67 49.07,64.31 MC2.17 49.07,64.08 49.84,64.08 51.13,65.38 52.12,65.38 52.88,64.62 52.88,56.16 54.33,54.71 C13.1 54.48,54.48 61.53,47.43 | SV3.13 53.19,24.69 v54.86,24.69 54.94,24.92 54.94,27.36 55.63,28.04 v55.63,29.87 | v62.03,20.73 62.03,24.69 C7.1 | DISP1.9 51.44,33.07 50.44,34.06 46.56,34.06 45.57,33.07 DISP1.5 45.34,32.84 43.66,31.17 39.01,31.17 30.25,39.93 27.05,39.93 JP2.1 | 64.16,50.06 61.53,47.43 | 61.53,47.43 60.88,46.79 60.88,38.33 61.95,37.26 61.95,36.27 C11.1 | 64.16,50.06 64.16,51.97 C5.1 | D2.C 69.27,49.53 64.85,49.53 64.39,49.99 64.16,50.06

## Text on the board
tNames: K | A | SCL | SDA | Vdd | GND | SCL | SDA | Vdd | GND | Configuration of X3 | Fan GND | Fan Vcc | G | RST | Vcc | GND | Grove | Grove | MKR | R | O | C | SPI | Raspberry Pi Zero | GND | RLY-B | RLY-A | V | SDA | I | SCL | 1 | D7 | 0 | GPIO | N | Vcc | N | To RUN Pad (RPiZW2) | Vcc | V | G | G | R | R | 102 | 331 | Vcc | Vdd | BRIDGE* | TO FAN* | 2-472 | 104 | 104 | 103 | 331 | NO | C | DS18B20+ | SD | RLY | SC | Vdd | G5V-1 | L1 | THS | SparkFun / Real Time Clock / Module (12708) | NC | G | GND | G | 4 | 5 | L0 | V | 221 | 2-Grove | THRU | THRU | OUT2 | OUT2 | G1 | NC | GPIO | G0 | Akizuki AQM0802A-RN-GBW | NC | 103 | Vcc | G7 | GND | G0 | G1 | TH | 00 | 01 | 02 | 03 | G6 | SND | 2 | G5 | TestPort II | RTN | TLP2630 | 1 | 74HCT05 (5V) | G4 | 103 | 103 | MNTR | TX | RX | G | SD | SC | D7 | V | G3 | Sweetio 0.0.1-X | G2 | 4-M2.3 | Vdd | GND | Designed for / Takachi / PF10-4-10 | IN | THRU | OUT | IN | OUT
bNames: SCL | SDA | Vdd | GND | SCL | SDA | Vdd | GND | RST | Grove | Grove | SPI | GND | SDA | MKR | SCL | D7 | GPIO | Vdd | Vcc | NC | T | O | O2 | Vdd | NC | TH | RX | MN | OUT | IN | V | LED1 | TH | THS | G | LED0 | Grove | MNTR | IN | OUT | OUT | THRU | THRU | OUT2 | OUT2 | G1 | NC | G0 | NC | GPIO | Vdd | G7 | GND | G6 | G0 | G1 | THS | 00 | 01 | 02 | 03 | A | G5 | MNTR | Grove | MIDI IN | MIDI OUT | K | G4 | TX | RX | GND | SDA | SDA | SCL | D7 | Vdd | G3 | G2 | MNTR | Vdd | GND | MIDI IN | MIDI THRU | MIDI OUT